# Altium PCB MainPCB.PcbDoc
Units mm, origin at the board's own origin, x right, y up, seen from the top; angles counter-clockwise.
Board outline 88.9 x 50.8 mm, 2 copper layers (Top Layer, Bottom Layer); 35 components, 31 nets, 192 pads, 0 vias.
Unrouted connection lines stored in the file: 103.
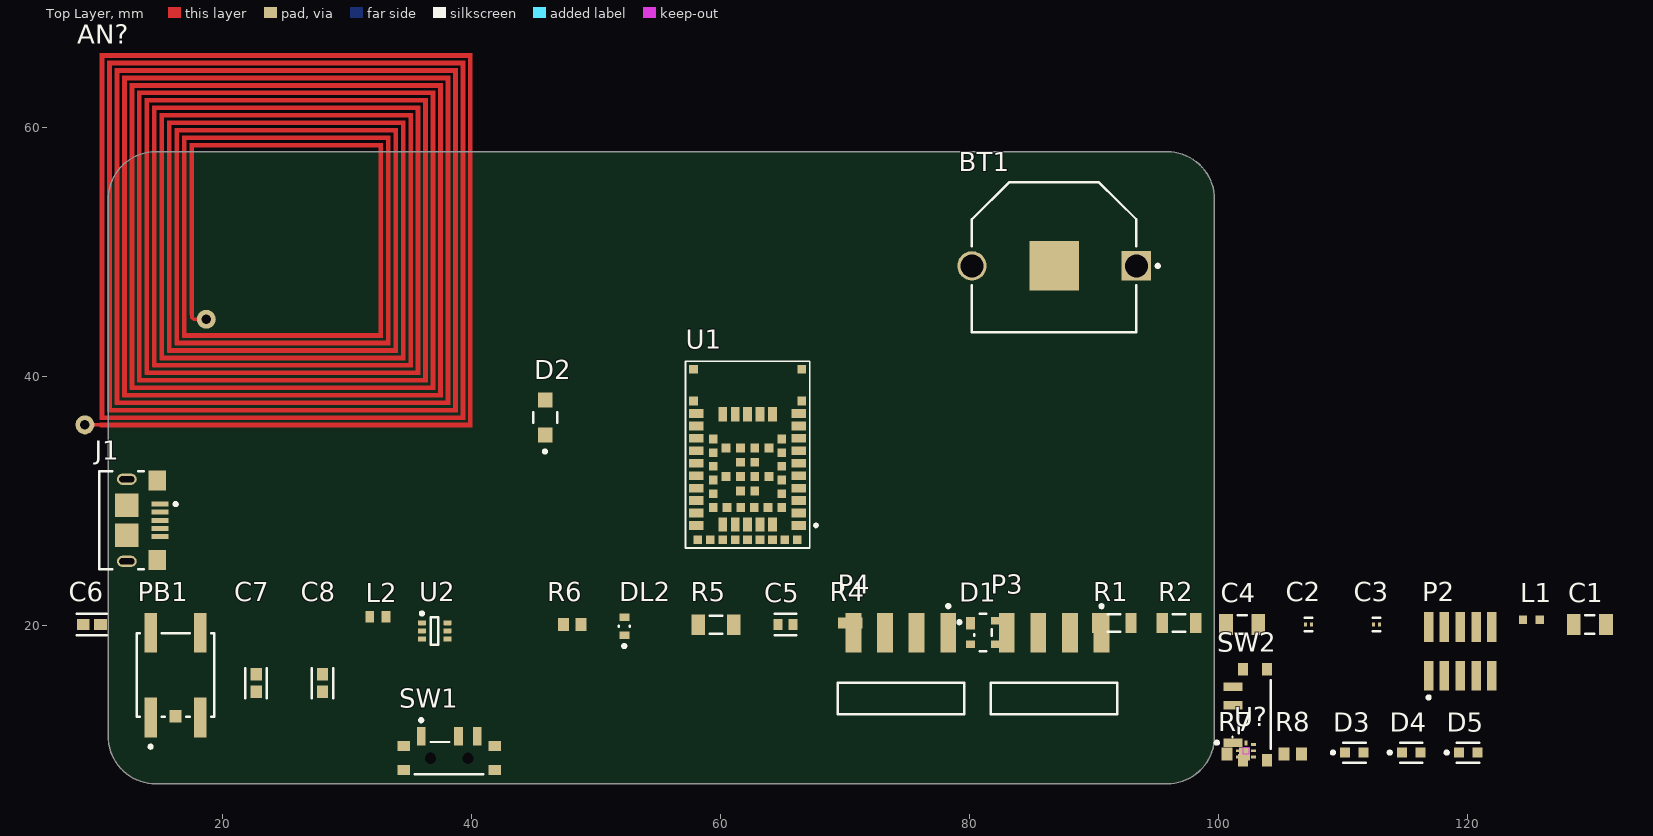
[diagram p0: Top Layer view]
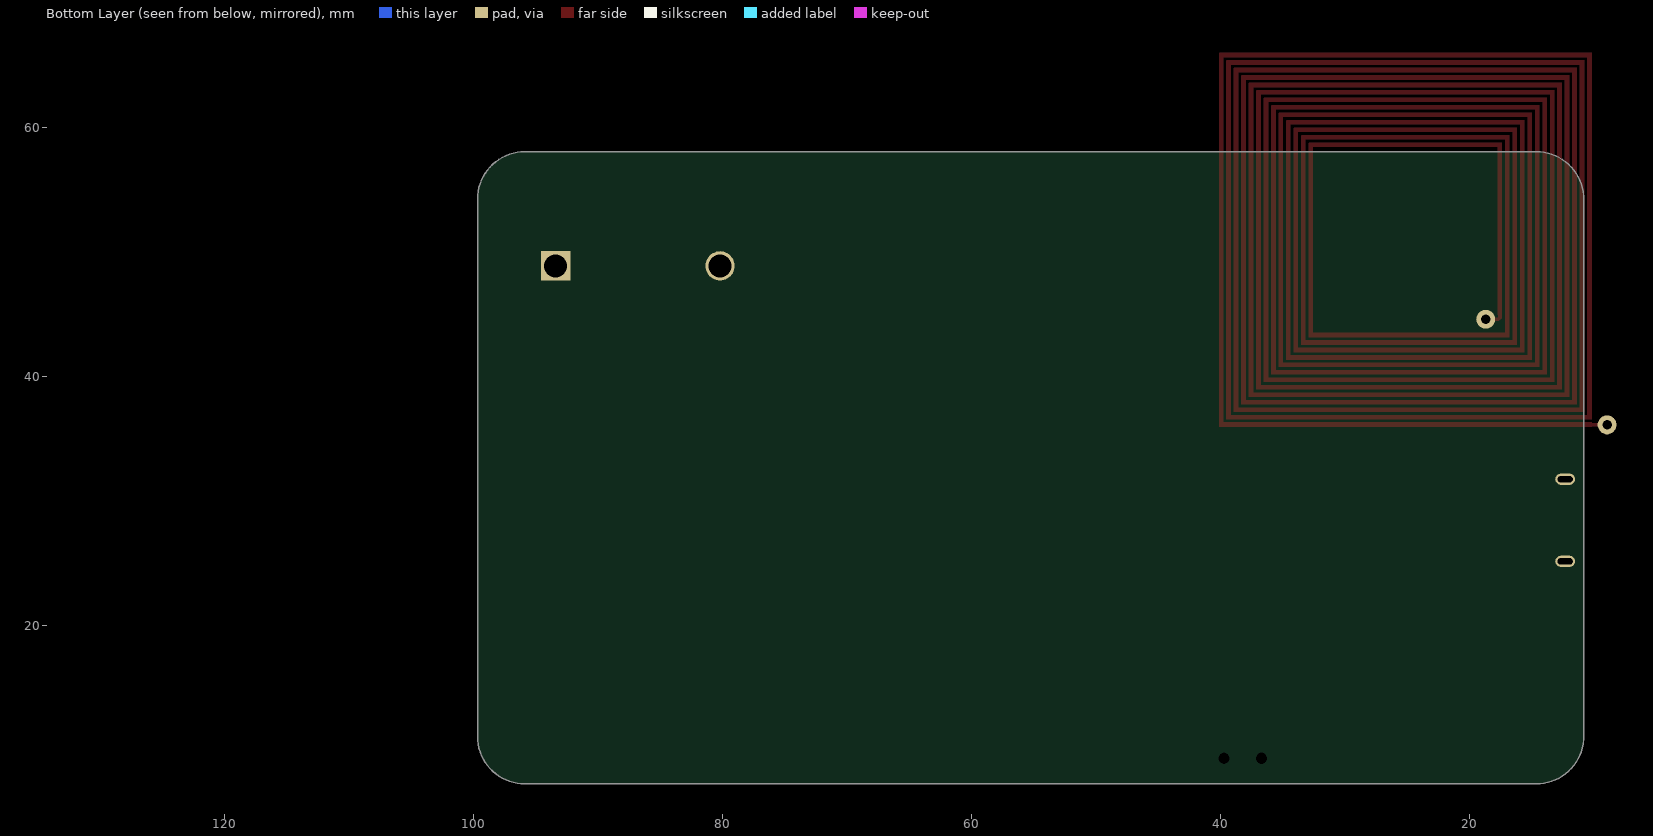
[diagram p1: Bottom Layer view, seen from below]

## Layer stack, top to bottom
Top Solder: solder mask 0.0102, Solder Resist, Dk 3.5
Top Layer: signal copper 0.0356
Dielectric 1: dielectric 0.32, FR-4, Dk 4.8
Bottom Layer: signal copper 0.0356
Bottom Solder: solder mask 0.0102, Solder Resist, Dk 3.5

## Board outline
10.795,11.049 10.795,54.229 cw(c14.605,54.229) 14.605,58.039 95.885,58.039 cw(c95.885,54.229) 99.695,54.229 99.695,11.049 cw(c95.885,11.049) 95.885,7.239 14.605,7.239 cw(c14.605,11.049)

## Design rules (kind name [scope] priority, off if disabled: settings)
Clearance [All] p1: gap=0.254 ignorepadtopadclearanceinfootprint=FALSE except(0: Arc-Hole Track-Hole SMDPad-Hole THPad-Hole Via-Hole Fill-Hole Poly-Hole Region-Hole Text-Hole)
PolygonConnect [All] p1: connectstyle=Relief reliefconductorwidth=0.254 reliefentries=4 polygonreliefangle="90 Angle" airgapwidth=0.254
RoomDefinition MainSchematic [InComponentClass('MainSchematic')] p1: confinementstyle=ConfineIn formatcopy=TRUE lockcomponents=FALSE outline 6.096,3.81 101.538,3.81 101.538,60.046 6.096,60.046
RoutingVias [All] p1: holewidth=0.711 width=1.27 viastyle="Through Hole" minholewidth=0.711 minwidth=1.27 maxholewidth=0.711 maxwidth=1.27
SolderMaskExpansion [All] p1: expansion=0.102 istentingtop=FALSE
Width [All] p1: maxlimit=0.254 minlimit=0.254 preferedwidth=0.254
30 further rules are at their usual default settings.

## Components (designator, comment, footprint, x,y, rotation, side; value= is the part's Value field where it differs from the comment)
AN? "NFC Antenna" NFC_Antenna 10.16,35.941 r0 top
BT1 "3001" KSTN-3001_V 86.806,48.87 r180 top
C1 "12065C102KAT2A" AVX-12065C102KAT2A_L 129.859,20.041 r0 top
C2 "GRM033R60J104KE19D" FP-GRM033-0_03-MFG 107.253,20.041 r0 top
C3 "GRM033R60J104KE19D" FP-GRM033-0_03-MFG 112.714,20.041 r0 top
C4 "12065C102KAT2A" AVX-12065C102KAT2A_L 101.919,20.041 r0 top
C5 "C0603C472J5RAC" FP-C0603C-CF-MFG 65.216,20.041 r0 top value="4,700 pF"
C6 "GRM188R60G106ME47D" FP-GRM188-0_1-e0_2_0_55-IPC_B 9.463,20.041 r0 top
C7 "GRM188R60G106ME47D" FP-GRM188-0_1-e0_2_0_55-IPC_B 22.671,15.342 r90 top
C8 "GRM188R60G106ME47D" FP-GRM188-0_1-e0_2_0_55-IPC_B 28.005,15.342 r90 top
D1 "PRTR5V0U2X,215" FP-SOT143B-MFG 81.091,19.406 r0 top
D2 "PMEG6020ELRX" FP-SOD123W-MFG 45.912,36.678 r90 top
D3 "VLMS1300-GS08" FP-6_541-5092_01-4-MFG 110.936,9.754 r0 top
D4 "VLMY1300-GS08" FP-6_541-5092_01-4-MFG 115.508,9.754 r0 top
D5 "VLMO1300-GS08CT" FP-6_541-5092_01-4-MFG 120.08,9.754 r0 top
DL2 "TLMP1100-GS08" FP-6_541-5056_01-4-MFG 52.262,19.914 r90 top
J1 "10118193-0001LF" FCI-10118193-0001LF-5_V 13.632,28.423 r270 top
L1 "BLM18EG101TN1D" MURA-BLM18-RF-H3-CHIP-2_V 125.16,20.422 r0 top
L2 "GLFR1608T4R7M-LR" INDC1608X100X35LL20T15 32.45,20.676 r0 top
P2 "20021121-00010C4LF" HDR2X5_SMT 119.445,17.882 r0 top
P3 "TSM-104-01-T-SH" SMTC-TSM-104-01-X-SH 86.806,13.975 r180 top
P4 "TSM-104-01-T-SH" SMTC-TSM-104-01-X-SH 74.487,13.975 r180 top
PB1 "EVQ-Q2H03W" FP-EVQ-Q2H03W-MFG 16.194,15.977 r90 top
R1 "CRCW12064K70JNEA" RESC3216X60X45LL10T20 91.632,20.168 r0 top
R2 "CRCW12064K70JNEA" RESC3216X60X45LL10T20 96.839,20.168 r0 top
R4 "ERJ-3EKF1004V" RESC1608X55X30LL15T15 70.423,20.168 r0 top
R5 "ERJ8ENF3300V" RESC3216X70X50NL05T20 59.628,20.041 r0 top
R6 "CRCW0603100RFKEA" RESC1609X50X30ML8T20 48.071,20.041 r0 top
R7 "CRCW0603100RFKEA" RESC1609X50X30ML8T20 101.411,9.627 r0 top
R8 "CRCW0603100RFKEA" RESC1609X50X30ML8T20 105.983,9.627 r0 top
SW1 "PCM12SMTR" CKCP-PCM12SMTR_V 38.189,9.302 r0 top
SW2 "PCM12SMTR" CKCP-PCM12SMTR_V 102.935,12.802 r90 top
U1 "NINA-B306" NINA_LGA71R_1500X1000X223_PCB 62.168,33.707 r90 top
U2 "TPS61221DCKR" DCK0006A_L 37.022,19.533 r0 top
U? "NT3H1101W0FHKH" NXP-SOT902-3_V 102.235,9.906 r0 top

## Footprints (in the part's own frame and the unit in brackets; to place one, negate y for a bottom-side part, rotate by r counter-clockwise, add the part's x,y. Pads: shape width x height; smd on the part's side, far side on the other; paste and mask are expansions set on the pad)
AVX-12065C102KAT2A_L [mm] "Chip Capacitor, 2-Leads, Body 3.4x1.8mm, IPC High Density"
  rect 1.1x1.7 smd: 1(-1.3,0) 2(1.3,0)
  silkscreen extent -0.35,-0.75 0.35,0.75
CKCP-PCM12SMTR_V [mm] "SMD, 3-Leads, Body 6.7x2.6mm"
  rect 0.7x1.5 smd: 1(-2.25,1.75) 2(0.75,1.75) 3(2.25,1.75)
  round 0.6 hole 0.9 unplated: MH1(-1.5,0) MH2(1.5,0)
  rect 1x0.8 smd: MP1(-3.65,0.965) MP2(3.65,0.965) MP3(-3.65,-0.965) MP4(3.65,-0.965)
  silkscreen extent -2.75,-1.3 2.75,3.17, body extent -3.68,-2.34 3.67,2.23, height 1.4
DCK0006A_L [mm] "SOT23, 6-Leads, Body 2.15x1.4mm, Pitch 0.65mm, IPC High Density"
  rrect25% 0.65x0.4 smd: 1(-1.025,0.65) 2(-1.025,0) 3(-1.025,-0.65) 4(1.025,-0.65) 5(1.025,0) 6(1.025,0.65)
  silkscreen extent -1.15,-1.1 0.3,1.52, body extent -1.14,-1 1.14,1, height 0.94
FCI-10118193-0001LF-5_V [mm] "Micro, USB-B, 5-Leads, Body 7.86x5.05mm, Pitch 0.65 mm"
  rect 0.4x1.35 smd: 1(-1.3,1.325) 2(-0.65,1.325) 3(0,1.325) 4(0.65,1.325) 5(1.3,1.325)
  rect 1.6x1.4 smd: 6(-3.2,1.1) 7(3.2,1.1)
  rect 1.9x1.9 smd: 8(-1.2,-1.35) 9(1.2,-1.35)
  oval 0.9x1.6 hole 0.5 slot 1.2 at 90 deg: 10(-3.3,-1.35) 11(3.3,-1.35)
  silkscreen extent -3.93,-3.55 3.93,2.7, body extent -3.93,-4.16 3.93,1.5, height 2.83
FP-6_541-5056_01-4-MFG [mm]
  rect 0.6x0.8 smd paste+0 mask+0: 1(-0.725,0) 2(0.725,0)
  silkscreen extent -1.72,-0.45 0.05,0.45, body extent -1.12,-0.55 1.12,0.55, height 0.25
FP-6_541-5092_01-4-MFG [mm]
  rect 0.8x0.8 smd paste+0 mask+0: 1(-0.75,0) 2(0.75,0)
  silkscreen extent -1.85,-0.8 0.9,0.8, body extent -1.25,-0.6 1.25,0.6, height 0.25
FP-C0603C-CF-MFG [mm]
  rect 0.75x0.9 smd paste+0 mask+0: 1(-0.6,0) 2(0.6,0)
  silkscreen extent -0.87,-0.85 0.88,0.85, body extent -1.2,-0.6 1.2,0.6, height 0.25
FP-EVQ-Q2H03W-MFG [mm]
  rect 1x1 smd paste+0 mask+0: 1(-3.3,0)
  rect 3.2x1 smd paste+0 mask+0: A(-3.4,2) A'(3.4,2) B(-3.4,-2) B'(3.4,-2)
  silkscreen extent -5.87,-3.1 3.35,3.1, body extent -5.1,-3.2 5.1,3.2, height 0.25
FP-GRM033-0_03-MFG [mm]
  rect 0.25x0.3 smd paste+0 mask+0: 1(-0.238,0) 2(0.238,0)
  silkscreen extent -0.32,-0.54 0.32,0.54, body extent -0.46,-0.27 0.46,0.27, height 0.25
FP-GRM188-0_1-e0_2_0_55-IPC_B [mm]
  rect 1.008x0.912 smd paste+0 mask+0: 1(-0.702,0) 2(0.702,0)
  silkscreen extent -1.21,-0.86 1.21,0.86, body extent -1.46,-0.71 1.46,0.71, height 0.25
FP-SOD123W-MFG [mm]
  rect 1.2x1.2 smd paste-1000 mask+0: 1(-1.4,0) 2(1.4,0)
  silkscreen extent -2.85,-0.95 0.43,0.95, body extent -2.2,-1.05 2.2,1.05, height 0.25
FP-SOT143B-MFG [mm]
  rect 0.7x1 smd paste-1000 mask+0: 1(-1,0.75)
  rect 0.7x0.6 smd paste-1000 mask+0: 2(-1,-0.95) 3(1,-0.95) 4(1,0.95)
  silkscreen extent -2.02,-1.5 0.7,1.5, body extent -1.5,-1.63 1.5,1.63, height 0.25
HDR2X5_SMT [mm] "Header, 10-Leads, Body 3.43x6.35mm, Pitch 1.27mm"
  rect 0.76x2.4 smd: 1(-2.54,-1.95) 2(-2.54,1.95) 3(-1.27,-1.95) 4(-1.27,1.95) 5(0,-1.95) 6(0,1.95) 7(1.27,-1.95) 8(1.27,1.95) 9(2.54,-1.95) 10(2.54,1.95)
  round 0 hole 1 unplated: MH1(-1.905,0) MH2(1.905,0)
  silkscreen extent -2.66,-3.82 -2.41,-3.58, body extent -3.17,-1.72 3.17,1.72, height 4.55
INDC1608X100X35LL20T15 [mm] "Chip Inductor, 2-Leads, Body 1.8x1mm, IPC High Density"
  rect 0.71x0.92 smd: 1(-0.65,0) 2(0.65,0)
  body extent -0.9,-0.5 0.9,0.5, height 1
KSTN-3001_V [mm] "THD, 2-Leads, Body 13.21x12.07mm"
  rect 2.35x2.35 hole 1.85: 1(-6.605,0)
  round 2.35 hole 1.85: 2(6.605,0)
  rect 3.96x3.96 smd: 3(0,0)
  silkscreen extent -8.45,-6.73 6.61,5.34, body extent -6.61,-6.73 6.61,5.34, height 3
MURA-BLM18-RF-H3-CHIP-2_V [mm] "Chip Ferrite Bead, 2-Leads, Body 1.6x0.8mm, Height 0.65mm, Reflow"
  rect 0.65x0.7 smd: 1(-0.675,0) 2(0.675,0)
  body extent -0.8,-0.4 0.8,0.4, height 0.65
NFC_Antenna [mil] "L=5.51 uH, tuned for 13.56 MHz"
  round 60 hole 30: AC0(335,340) AC1(-49.09,5.91)
  Top Layer region: 0,0 0,11.81 1165.35,11.81 1165.35,1169.29 11.81,1169.29 11.81,35.43 1141.73,35.43 1141.73,1145.67 35.43,1145.67 35.43,59.06 1118.11,59.06 1118.11,1122.05 59.06,1122.05 59.06,82.68 1094.49,82.68 1094.49,1098.43 82.68,1098.43 82.68,106.3 1070.87,106.3 1070.87,1074.8 106.3,1074.8 106.3,129.92 1047.24,129.92 1047.24,1051.18 129.92,1051.18 129.92,153.54 1023.62,153.54 1023.62,1027.56 153.54,1027.56 153.54,177.17 1000,177.17 1000,1003.94 177.17,1003.94 177.17,200.79 976.38,200.79 976.38,980.32 200.79,980.32 200.79,224.41 952.76,224.41 952.76,956.69 224.41,956.69 224.41,248.03 929.13,248.03 929.13,933.07 248.03,933.07 248.03,271.65 905.51,271.65 905.51,909.45 271.65,909.45 271.65,295.28 881.89,295.28 881.89,885.83 295.28,885.83 295.28,354.33 283.46,354.33 283.46,897.64 893.7,897.64 893.7,283.46 259.84,283.46 259.84,921.26 917.32,921.26 917.32,259.84 236.22,259.84 236.22,944.88 940.94,944.88 940.94,236.22 212.6,236.22 212.6,968.5 964.57,968.5 964.57,212.6 188.98,212.6 188.98,992.13 988.19,992.13 988.19,188.98 165.35,188.98 165.35,1015.75 1011.81,1015.75 1011.81,165.35 141.73,165.35 141.73,1039.37 1035.43,1039.37 1035.43,141.73 118.11,141.73 118.11,1062.99 1059.06,1062.99 1059.06,118.11 94.49,118.11 94.49,1086.61 1082.68,1086.61 1082.68,94.49 70.87,94.49 70.87,1110.24 1106.3,1110.24 1106.3,70.87 47.24,70.87 47.24,1133.86 1129.92,1133.86 1129.92,47.24 23.62,47.24 23.62,1157.48 1153.54,1157.48 1153.54,23.62 0,23.62 0,1181.1 1177.17,1181.1 1177.17,0
  Top Layer lines w0.5: 0,0 0,11.81 1165.35,11.81 1165.35,1169.29 11.81,1169.29 11.81,35.43 1141.73,35.43 1141.73,1145.67 35.43,1145.67 35.43,59.06 1118.11,59.06 1118.11,1122.05 59.06,1122.05 59.06,82.68 1094.49,82.68 1094.49,1098.43 82.68,1098.43 82.68,106.3 1070.87,106.3 1070.87,1074.8 106.3,1074.8 106.3,129.92 1047.24,129.92 1047.24,1051.18 129.92,1051.18 129.92,153.54 1023.62,153.54 1023.62,1027.56 153.54,1027.56 153.54,177.17 1000,177.17 1000,1003.94 177.17,1003.94 177.17,200.79 976.38,200.79 976.38,980.32 200.79,980.32 200.79,224.41 952.76,224.41 952.76,956.69 224.41,956.69 224.41,248.03 929.13,248.03 929.13,933.07 248.03,933.07 248.03,271.65 905.51,271.65 905.51,909.45 271.65,909.45 271.65,295.28 881.89,295.28 881.89,885.83 295.28,885.83 295.28,354.33 283.46,354.33 283.46,897.64 893.7,897.64 893.7,283.46 259.84,283.46 259.84,921.26 917.32,921.26 917.32,259.84 236.22,259.84 236.22,944.88 940.94,944.88 940.94,236.22 212.6,236.22 212.6,968.5 964.57,968.5 964.57,212.6 188.98,212.6 188.98,992.13 988.19,992.13 988.19,188.98 165.35,188.98 165.35,1015.75 1011.81,1015.75 1011.81,165.35 141.73,165.35 141.73,1039.37 1035.43,1039.37 1035.43,141.73 118.11,141.73 118.11,1062.99 1059.06,1062.99 1059.06,118.11 94.49,118.11 94.49,1086.61 1082.68,1086.61 1082.68,94.49 70.87,94.49 70.87,1110.24 1106.3,1110.24 1106.3,70.87 47.24,70.87 47.24,1133.86 1129.92,1133.86 1129.92,47.24 23.62,47.24 23.62,1157.48 1153.54,1157.48 1153.54,23.62 0,23.62 0,1181.1 1177.17,1181.1 1177.17,0 0,0
  Top Layer lines w11.81: -49.09,5.91 0,5.91 ; 289.37,354.33 289.37,345.63 295,340 335,340
NINA_LGA71R_1500X1000X223_PCB [mm] "Stand-alone Bluetooth low energy module"
  rect 0.7x1.15 smd paste+0 mask+0.05: 1(-5.7,-4.125) 2(-4.7,-4.125) 3(-3.7,-4.125) 4(-2.7,-4.125) 5(-1.7,-4.125) 6(-0.7,-4.125) 7(0.3,-4.125) 8(1.3,-4.125) 9(2.3,-4.125) 10(3.3,-4.125) 16(3.3,4.125) 17(2.3,4.125) 18(1.3,4.125) 19(0.3,4.125) 20(-0.7,4.125) 21(-1.7,4.125) 22(-2.7,4.125) 23(-3.7,4.125) 24(-4.7,4.125) 25(-5.7,4.125)
  rect 1.15x0.7 smd paste+0 mask+0.05: 11(3.225,-2) 12(3.225,-1) 13(3.225,0) 14(3.225,1) 15(3.225,2) 26(-5.625,2) 27(-5.625,1) 28(-5.625,0) 29(-5.625,-1) 30(-5.625,-2)
  rect 0.7x0.7 smd paste+0 mask+0.05: 31(-4.25,-2.75) 32(-3.15,-2.75) 33(-2.05,-2.75) 34(-0.95,-2.75) 35(0.15,-2.75) 36(1.25,-2.75) 37(1.25,2.75) 38(0.15,2.75) 39(-0.95,2.75) 40(-2.05,2.75) 41(-3.15,2.75) 42(-4.25,2.75) 43(-4.25,1.65) 44(-4.25,0.55) 45(-4.25,-0.55) 46(-4.25,-1.65) 47(-6.85,4) 48(-6.85,3) 49(-6.85,2) 50(-6.85,1) 51(-6.85,0) 52(-6.85,-1) 53(-6.85,-2) 54(-6.85,-3) 55(-6.85,-4) 56(-2.925,-0.575) 57(-2.925,0.575) 58(-1.775,-1.725) 59(-1.775,-0.575) 60(-1.775,0.575) 61(-1.775,1.725) 62(-0.625,-0.575) 63(-0.625,0.575) 64(0.525,-1.725) 65(0.525,-0.575) 66(0.525,0.575) 67(0.525,1.725) 68(4.3,-4.35) 69(6.85,-4.35) 70(6.85,4.35) 71(4.3,4.35)
  Multi-Layer pour cut-out: 4.4,4 7.5,4 7.5,-4 4.4,-4
  silkscreen extent -7.5,-5.6 7.5,5, body extent -7.5,-5 7.5,5, height 2.31
NXP-SOT902-3_V [mm] "QFN, 8-Leads, Body 1.6x1.6mm, Pitch 0.5mm"
  rect 0.4x0.32 smd: 1(-0.6,0.5)
  rect 0.4x0.22 smd: 2(-0.6,0) 3(-0.6,-0.5) 5(0.6,-0.5) 6(0.6,0) 7(0.6,0.5)
  rect 0.22x0.4 smd: 4(0,-0.6) 8(0,0.6)
  Top Layer keep-out region: -0.25,-0.25 0.25,-0.25 0.25,0.25 -0.25,0.25
  silkscreen extent -1.15,1.05 -1.05,1.15, body extent -0.8,-0.8 0.8,0.8, height 0.5
RESC1608X55X30LL15T15 [mm] "Chip Resistor, 2-Leads, Body 1.60x0.80mm, IPC High Density"
  rect 0.7x0.85 smd: 1(-0.625,0) 2(0.625,0)
  body extent -0.87,-0.48 0.87,0.48, height 0.55
RESC1609X50X30ML8T20 [mm] "Chip Resistor, 2-Leads, Body 1.65x0.95mm, IPC Low Density"
  rect 0.9x1.05 smd: 1(-0.7,0) 2(0.7,0)
  body extent -0.82,-0.48 0.82,0.48, height 0.5
RESC3216X60X45LL10T20 [mm] "Chip Resistor, 2-Leads, Body 3.20x1.60mm, IPC High Density"
  rect 0.9x1.6 smd: 1(-1.35,0) 2(1.35,0)
  silkscreen extent -0.5,-0.7 0.5,0.7, body extent -1.65,-0.85 1.65,0.85, height 0.6
RESC3216X70X50NL05T20 [mm] "Chip Resistor, 2-Leads, Body 3.20x1.60mm, IPC Medium Density"
  rect 1.1x1.65 smd: 1(-1.425,0) 2(1.425,0)
  silkscreen extent -0.5,-0.72 0.5,0.72, body extent -1.63,-0.82 1.62,0.82, height 0.7
SMTC-TSM-104-01-X-SH [mm] "Terminal Strip Single Surface Mount, 1x4 Pins, Horizontal, 2.54mm Pitch, Male"
  rect 1.27x3.18 smd: 1(-3.81,-5.402) 2(-1.27,-5.402) 3(1.27,-5.402) 4(3.81,-5.402)
  silkscreen extent -5.08,-7.67 5.08,1.15, body extent -5.08,-5.96 5.08,6.99, height 3.05

## Part data
AN?: library part NFC_Antenna, "L=5.51 uH, tuned for 13.56 MHz", L="5.51 uH"
BT1: library part CMP-2000-05463-1, "Holder Battery Coin, 12 mm, 2-Pin THD, RoHS", Manufacturer=Keystone, Package Description="2-Pin Through Hole Device, Body 13.21 x 12.07 mm", Datasheet URL=https://datasheet.ciiva.com/3/3001-3954.pdf, Datasheet Version="Rev. H, 09/2006", Manufacturer URL=http://www.keyelco.com/, Mounting Technology=ThroughHole, Package Reference=3001
C1 C4: library part CMP-2000-05865-1, "Chip Capacitor, 1 nF, +/- 10%, 50 V, -55 to 125 degC, 1206 (3216 Metric), RoHS, Tape and Reel", Capacitance=1nF, Case Size/Dimension=1206, Dielectric=X7R, Manufacturer=AVX, Package Description="2-Pin Surface Mount Device, Body 3.2 x 1.6 mm", Rated Voltage=50V, Tolerance (%)=±10%, Datasheet URL=http://datasheets.avx.com/X7RDielectric.pdf, Datasheet Version=07/2016, Manufacturer URL=http://www.avx.com/, Mounting Technology=SurfaceMount, Package=1206, Package Reference=1206
C2 C3: library part CMP-06035-000062-2, "Chip Multilayer Ceramic Capacitors for General Purpose, 0201, 0.10uF, X5R, 15%, 10%, 6.3V", Capacitance=100nF, Case Code (Imperial)=0201, Case Code (Metric)=0603, Dielectric=X5R, Max Operating Temperature=85°C, Min Operating Temperature=-55°C, Package Quantity=1, Tolerance=10%, Voltage=6.3V, Case/Package=0201, Depth=0.3mm, Height=0.3mm, Lead Free="Lead Free", Length=0.6mm, Material=Ceramic, Mount="Surface Mount", Packaging="Tape and Reel", Radiation Hardening=No, REACH SVHC="No SVHC", Termination=SMD/SMT, Thickness=0.013inch, Voltage Rating=6.3V, Voltage Rating (DC)=6.3V, Weight=6E-06oz, Width=0.012inch
C5: library part CMP-03020-004543-2, "C0603 4,700 pF X7R 30ppm/°C 5.00% 50 V", Capacitance="4,700 pF", Manufacturer=KEMET, Package=C0603C-CF, Temperature="-55°C to +125°C", Temperature Characteristic=X7R, Temperature Coefficient=30ppm/°C, Temperature Range High=+125°C, Temperature Range Low=-55°C, Tolerance=0.05, Voltage Rating="50 V", Automotive=Yes, Automotive Grade="Grade 1", Category=Cap, ComponentLink2Description=Datasheet, ComponentLink2URL=https://api.kemet.com/component-edge/download/datasheet/C0603C100J5GACAUTO.pdf, Device Class L1="Passive Components", Device Class L2=Capacitors, Device Class L3="Ceramic Capacitors", Height=0.87mm, Lead Free=Yes, Manufacturer Part Number=C0603C472J5RAC, Material=Ceramic, Mouser Description="Cap Ceramic 0.0047uF 50V X7R 5% Pad SMD 0603 125C Bag", Octopart=https://octopart.com/c0603c472j5rac-kemet-965121, RoHS=TRUE
C6 C7 C8: library part CMP-2006-02787-5, "Chip Multilayer Ceramic Capacitors for General Purpose, 0603, 10uF, X5R, 15%, 20%, 4V", Capacitance=10uF, Case Code (Imperial)=0603, Case Code (Metric)=1608, Dielectric=X5R, Max Operating Temperature=85°C, Min Operating Temperature=-55°C, Package Quantity=4000, Tolerance=20%, Voltage=4V, Case/Package=0603, Depth=0.8mm, Height=0.8mm, Lead Free="Lead Free", Length=1.6mm, Mount="Surface Mount", Packaging="Tape and Reel", Radiation Hardening=No, Termination=SMD/SMT, Thickness=0.035inch, Voltage Rating=4V, Voltage Rating (DC)=4V, Width=0.8mm
D1: library part CMP-14436-000007-1, "TVS DIODE 5.5V SOT143B", Manufacturer=Nexperia, Package=SOT-143B
D2: library part CMP-14398-000020-1, "DIODE SCHOTTKY 60V 2A SOD123W"
D3: library part CMP-02520-000012-1, "LED RED 0603 SMD", Ambient Temperature Range High=+85°C, Ambient Temperature Range Low=-35°C, Colour=Red, Forward Current=20mA, Forward Voltage=2V, Manufacturer=Vishay, Package=6.541-5092.01-4, Power Dissipation=75mW, Reverse Voltage=5V, Temperature="-35°C to +85°C", Automotive=No, Category=Diode, ComponentLink2Description=Datasheet, ComponentLink2URL=http://www.vishay.com/docs/82437/vlmo1300.pdf, Device Class L1=Optoelectronics, Device Class L2=LEDs, Device Class L3=unset, Digikey Description="LED RED 0603 SMD", Height=1mm, Lead Free=Yes, Led Orientation="Top View", Luminous Intensity=54mcd, Manufacturer Part Number=VLMS1300-GS08, Mouser Description="Standard LEDs - SMD Super Red Clear Non-Diff", Octopart=https://octopart.com/vlms1300-gs08-vishay-21709201, Peak Emmision Wavelength=639nm, RoHS=TRUE, Temperature Range High=+85°C, Temperature Range Low=-35°C, Viewing Angle=130°, Wavelength=631nm
D4: library part CMP-02520-000001-1, "LED YELLOW 0603 SMD", Ambient Temperature Range High=+85°C, Ambient Temperature Range Low=-35°C, Colour=Yellow, Forward Current=20mA, Forward Voltage=2.4V, Manufacturer=Vishay, Package=6.541-5092.01-4, Power Dissipation=75mW, Reverse Voltage=5V, Temperature="-35°C to +85°C", Automotive=No, Category=Diode, ComponentLink2Description=Datasheet, ComponentLink2URL=https://www.vishay.com/docs/82437/vlmo1300.pdf, Device Class L1=Optoelectronics, Device Class L2=LEDs, Device Class L3=unset, Digikey Description="LED YELLOW 0603 SMD", Height=1mm, Lead Free=Yes, Led Orientation="Top View", Luminous Intensity=28-180mcd, Manufacturer Part Number=VLMY1300-GS08, Octopart=https://octopart.com/vlmy1300-gs08-vishay-21709204, Peak Emmision Wavelength=588nm, RoHS=TRUE, Temperature Range High=+85°C, Temperature Range Low=-35°C, Viewing Angle=130°, Wavelength=597nm
D5: library part CMP-02520-000001-1, "LED YELLOW 0603 SMD", Ambient Temperature Range High=+85°C, Ambient Temperature Range Low=-35°C, Colour=Yellow, Forward Current=20mA, Forward Voltage=2.4V, Manufacturer=Vishay, Manufacturer Part Number=VLMY1300-GS08, Package=6.541-5092.01-4, Power Dissipation=75mW, Reverse Voltage=5V, Temperature="-35°C to +85°C", Automotive=No, Category=Diode, ComponentLink2Description=Datasheet, ComponentLink2URL=https://www.vishay.com/docs/82437/vlmo1300.pdf, Device Class L1=Optoelectronics, Device Class L2=LEDs, Device Class L3=unset, Digikey Description="LED YELLOW 0603 SMD", Height=1mm, Lead Free=Yes, Led Orientation="Top View", Luminous Intensity=28-180mcd, Octopart=https://octopart.com/vlmy1300-gs08-vishay-21709204, Peak Emmision Wavelength=588nm, RoHS=TRUE, Supplier 1=Digi-Key, Temperature Range High=+85°C, Temperature Range Low=-35°C, Viewing Angle=130°, Wavelength=597nm
DL2: library part CMP-02520-000009-1, "LED GREEN 0603 SMD", Ambient Temperature Range High=+100°C, Ambient Temperature Range Low=-40°C, Colour="Pure green", Forward Current=20mA, Forward Voltage=2.1V, Manufacturer=Vishay, Max Junction Temp=+120°C, Package=0603, Power Dissipation=90mW, Reverse Voltage=6V, Temperature="to +120°C", Automotive=Yes, Automotive Grade="Grade 3", Category=Diode, ComponentLink2Description=Datasheet, ComponentLink2URL=http://www.vishay.com/docs/83173/tlmb1100.pdf, Device Class L1=Optoelectronics, Device Class L2=LEDs, Device Class L3=unset, Digikey Description="LED GREEN 0603 SMD", Height=0.65mm, Lead Free=Yes, Led Orientation="Top View", Luminous Intensity=15mcd, Manufacturer Part Number=TLMP1100-GS08, Mouser Description="Standard LEDs - SMD Pure Green", Octopart=https://octopart.com/tlmp1100-gs08-vishay-55433993, Peak Emmision Wavelength=562nm, RoHS=TRUE, Temperature Range High=+120°C, Viewing Angle=160°, Wavelength=561nm
J1: library part CMP-2000-05119-1, "Micro USB B Type Receptacle, -55 to 85 degC, 5-Pin SMD, RoHS, Tape and Reel", Color=Black, Current Rating=1.8A, Flammability Rating=UL94V-0, Insulation Resistance=1000MOhms, Manufacturer=FCI, Operating Temperature Range=-55Cto+85C, Brand=FCI, Connector Type=MicroUSBTypeBreceptacle, Contact Material=CopperAlloy, Contact Plating=Gold, Datasheet URL=http://datasheet.octopart.com/10118193-0001LF-FCI-datasheet-55953155.pdf, Datasheet Version="Rev. C, 05/2015", Factory Pack Quantity=1200, Gender=Female, Manufacturer URL=http://www.fci.com/, Mounting Angle=Right, Number Of Contacts=5Contact, Packaging=Reel, Product=MicroUSBTypeBConnectors, Product Category=USBConnectors, RoHS=Details, Standard=USB2.0, Termination Style=SMD/SMT
L1: library part CMP-0686-00530-2, "Chip Ferrite Bead for GHz Band General Use (Low DC Resistance Type), 100 Ohm, 2000 mA, -55 to 125 degC, 1.6 x 0.8 x 0.65 mm SMD, Tape and Reel", DC Resistance="0.045 Ohm Max.", Manufacturer=Murata, Operating Temperature Range="-55 to 125 degC", Package=0603, Rated Current="2000 mA", ComponentLink1Description="Manufacturer URL", ComponentLink1URL=http://www.murata.com/, ComponentLink2Description=Datasheet, ComponentLink2URL=http://www.murata.com/products/catalog/pdf/c31e.pdf, ComponentLink3Description="Package Specification", ComponentLink3URL=http://www.murata.com/products/catalog/pdf/c31e.pdf, DatasheetVersion=08/2013, Impedance (at 100 MHz)="100 Ohm +/- 25%", Mounting Technology="Surface Mount", PackageDescription="2-Pin Chip, Body 1.6 x 0.8 mm", PackageReference=BLM18_H650-2, Packing="Tape and Reel", PartNumber=BLM18EG101TN1D
L2: library part CMP-2000-06322-1, "Chip Inductor, 4.7 uH, +/- 20%, -40 to 105 degC, 0603 (1608 Metric), RoHS, Tape and Reel", Current - Saturation=170mA, Current Rating=110mA, DC Resistance (DCR)=240mOhm, Inductance=4.7µH, Manufacturer=TDK, Operating Temperature=-40°C~105°C, Package / Case=0603(1608Metric), Package Description="2-Pin Surface Mount Device, Body 1.6 x 0.8 mm", Package Reference=0603, Standard Package=4,000, Tolerance=±20%, Catalog Drawings="1608(0603)Top /  / 1608(0603)Side", Category=Inductors,Coils,Chokes, Datasheet URL=http://media.digikey.com/pdf/Data%20Sheets/TDK%20PDFs/GLFR%20Series.pdf, Datasheet Version=07/2008, Dynamic Catalog=GLFRSeries, Family=FixedInductors, Manufacturer URL=http://www.tdk.com/, Mounting Technology=SurfaceMount, Mounting Type=SurfaceMount, Other Names=445-3607-2, Other Related Documents=1608(0603)Footprint, Packaging=Tape&Reel(TR), Series=GLFR, Shielding=Shielded, Size / Dimension="0.063\"Lx0.031\"Wx0.031\"H(1.60mmx0.80mmx0.80mm)"
P2: library part CMP-2000-05523-1, "Male Header, Pitch 1.27 mm, 2 x 5 Position, Height 4.55 mm, -40 to 85 degC, RoHS, Tape and Reel", Contact resistance Max=30MOhm, Current Rating=1A, Manufacturer=FCI, Package="SMT 10P", Package Description="10-Leads Header, Body 3.43 x 6.35, Pitch 1.27 mm", Package Reference=20021121, Package Version="Rev. J, 03/2013", Voltage Rating=125V, Brand=FCI, Contact Material=CopperAlloy, Contact Plating=Gold, Datasheet URL=https://datasheet.ciiva.com/11749/0900766b8118d62a-11749057.pdf, Datasheet Version=06/2011, Factory Pack Quantity=600, Gender=Male, Manufacturer URL=http://portal.fciconnect.com/, Mating Post Length=3.05mm, Mounting Angle=Vertical, Mounting Style=SMD/SMT, Mounting Technology=SurfaceMount, Number of Positions=10, Number of Positions / Contacts=10, Number of Rows=2, Package URL=https://datasheet.ciiva.com/26853/getdatasheetpartid-177140-26853984.pdf, Packaging=Reel, Pitch=1.27mm, Product Category=Headers&WireHousings, Product Type=Headers, RoHS=Details, Series=Minitek, Stack Height=3mm, Termination Style=SMD, Type=Unshrouded
P3 P4: library part CMP-1024-00223-1, "0.025\" SQ Post Header, Surface Mount, Horizontal, -55 to 105 degC, 2.54 mm Pitch, 4-Pin, Male, RoHS", Manufacturer=Samtec, Temperature Range="-55 to 105 degC", ComponentLink1Description="Manufacturer URL", ComponentLink1URL=http://www.samtec.com, ComponentLink2Description=Datasheet, ComponentLink2URL=http://www.samtec.com/documents/webfiles/pdf/TSM.PDF, ComponentLink3Description="Package Specification", ComponentLink3URL=http://www.samtec.com/documents/webfiles/cpdf/TSM-1XX-XX-XXX-SH-XX-XXX-XX-MKT1.pdf, DatasheetVersion=F-214, Mounting Technology="Surface Mount", Orientation=Horizontal, PackageDescription="Terminal Strip Single Surface Mount", PackageReference=TSM-104-01-X-SH, PackageVersion="CD, 7/1991", PartNumber=TSM-104-01-T-SH, Pitch="2.54 mm", RoHS=True
PB1: library part CMP-05618-000002-1, "SWITCH TACTILE SPST-NO 0.02A 15V", Contact Current Rating=20mA, Contact Resistance=100mΩ, Manufacturer="Panasonic Electronic Components", Operating Force=1N, Package="SMT 4P", Temperature="-40°C to +85°C", Temperature Range High=+85°C, Temperature Range Low=-40°C, Voltage Rating DC=15V, Automotive=No, Category=Switch, ComponentLink2Description=Datasheet, ComponentLink2URL=https://industrial.panasonic.com/ac/cdn/e/control/switch/light-touch/catalog/sw_lt_eng_6s_th.pdf, Device Class L1=Electromechanical, Device Class L2=Switches, Device Class L3="Tactile Switches", Digikey Description="SWITCH TACTILE SPST-NO 0.02A 15V", Electromechanical Life=1000000Cycles, Height=3.3mm, Lead Free=Yes, Manufacturer Part Number=EVQ-Q2H03W, Mount="Surface Mount", Mouser Description="Switch Tactile ON OFF SPST Round Button J-Bend 0.02A 15VDC 1N SMD Embossed T/R", Octopart=https://octopart.com/evq-q2h03w-panasonic-1368538, RoHS=TRUE, Throw Configuration=SPST-NO
R1 R2: library part CMP-2003-02236-1, "Resistor, 4.7kOhm", Manufacturer="Vishay Dale", Package=1206, Part Number=CRCW12064K70JNEA
R4: library part CMP-1012-00849-2, Manufacturer=Panasonic, Part Number=ERJ-3EKF1004V
R5: library part CMP-2003-00307-1, "Resistor, 330 Ohm", Manufacturer=Panasonic, Package=1206, Part Number=ERJ8ENF3300V
R6 R7 R8: library part CMP-2000-03824-5, "Chip Resistor, 100 Ohm, +/- 1%, 100 mW,-55 to 155 degC, 0603 (1608 Metric), RoHS, Tape and Ree", Manufacturer="Vishay Semiconductor", ComponentLink1Description="Manufacturer URL", ComponentLink1URL=http://www.vishay.com/, ComponentLink2Description=Datasheet, ComponentLink2URL=http://www.vishay.com/docs/20035/dcrcwe3.pdf, DatasheetVersion=06/2012, Mounting Technology="Surface Mount", PackageDescription="2-Pin Surface Mount Device, Body 1.575 x 0.85 mm", PackageReference=0603
SW1 SW2: library part CMP-2000-06884-1, "Ultraminiature Slide Switch, SPDT, 0.3 A, 6 V, -20 to 85 degC, 3-Pin SMD, RoHS, Tape and Reel", Contact Current-Max=0.3A, Manufacturer="C&K Components", Package Description="3-Pin Surface Mount Device, Body 6.7 x 2.6 mm", Circuitry=SPDT, Contact Material=SilverOverCopper, Datasheet URL=http://www.ck-components.com/media/1424/pcm.pdf, Datasheet Version=02/2016, Manufacturer URL=http://www.ckswitches.com/, Mounting Technology=SurfaceMount, Package Reference=PCM12SMTR, Switch Operation=On-On, Termination Style=RightAngle/SurfaceMount
U1: "Stand-alone Bluetooth low energy module", Manufacturer=u-blox, Package=55-SMD, Part Description="Stand-alone Bluetooth low energy module"
U2: library part CMP-0343-00082-2, "Boost Voltage Converter with 0.7 to 5.5 V Input and 3.3 V Output, -40 to 85 degC, 6-Pin SC70 (DCK), Green (RoHS & no Sb/Br)", Manufacturer="Texas Instruments", Switching Frequency(Max)(kHz)=2000, Code_JEDEC=MO-203-AB, ComponentLink1Description=Datasheet, ComponentLink1URL=http://www.ti.com/general/docs/lit/getliterature.tsp?genericPartNumber=TPS61221&fileType=pdf, ComponentLink2Description="Package Specification", ComponentLink2URL=http://www.ti.com/litv/pdf/mpds114c, DatasheetVersion=SLVS776, Eco-Plan="Green (RoHS & no Sb/Br)", Mounting Technology="Surface Mount", PackageDescription="6-Pin Plastic Small-Outline Package, 2 x 1.3 mm Body, 0.65 mm Pitch, 2.1 mm Lead Span", PackageReference=DCK0006A, PackageVersion="revG, Jan-2007", PartNumber=TPS61221DCKR, Regulated Outputs(#)=1, SubFamily="Step-Up Regulator", Topology=Boost, Vin(Max)(V)=5.5, Vin(Min)(V)=0.7, Vout(Max)(V)=3.3, Vout(Min)(V)=3.3
U?: library part CMP-2000-06861-1, "NTAG I2C-Energy Harvesting NFC Forum Type 2 Tag with Field Detection Pin and I2C Interface, 1.7 to 3.6 V, -40 to 95 degC, 8-Pin QFN (SOT-902-3), RoHS, Tape and Reel", Manufacturer=NXP, Maximum Operating Temperature=+85C, Minimum Operating Temperature=-40C, Operating Frequency=13.56MHz, Operating Temperature Range=-40Cto+85C, Package / Case=XQFN-8, Package Description="8-Pin Quad Flat No-lead Package, Body 1.6 x 1.6 mm, Pitch 0.5 mm", Package Reference=SOT902-3, Package Version=02/2016, Brand=NXPSemiconductors, Datasheet URL=http://www.nxp.com/documents/data_sheet/NT3H1101_1201.pdf, Datasheet Version="Rev. 3.3, 07/2015", Factory Pack Quantity=4000, Function=NTAGI2CNFCForumType2interface, Manufacturer URL=http://www.nxp.com/, Memory Size=1kB, Mounting Style=SMD/SMT, Mounting Technology=SurfaceMount, Package URL=http://www.nxp.com/documents/outline_drawing/SOT902-3.pdf, Packaging=Reel, Product Category=RFIDTransponders, RoHS=True

## Nets (pads, with @x,y where several pads share a name; then routed paths per layer and width w, separated by ;. In a path a pad name is that pad's centre, name@x,y a point inside that pad or via, vN(x,y) a via of type N, cw(c..) or ccw(c..) an arc to the next point about the centre after c; other vN are vias at no path point)
+3V3: C2.2 C3.1 C8.1 P2.1 P3.2 SW2.1 U1.9 U1.10 U2.2 U2.4
AIN3_A0: P3.4 U1.25
D2: D4.2 U1.39
D3: D5.2 U1.44
D4: D3.2 U1.40
D5: SW2.2 U1.22
D+: D1.2 J1.3 U1.54
D-: D1.3 J1.2 U1.55
GND: BT1.1 BT1.2 C1.1 C2.1 C3.2 C4.1 C5.2 C6.2 C7.2 C8.2 DL2.1 J1.5 P2.3 P2.5 P3.1 PB1.B PB1.B' R4.1 R6.1 R7.1 R8.1 SW2.3 U1.6 U1.12 U1.14 U1.26 U1.30 U1.53 U1.56 U1.57 U1.58 U1.59 U1.60 U1.61 U1.62 U1.63 U1.64 U1.65 U1.66 U1.67 U1.68 U1.69 U1.70 U1.71 U2.3
NetBT1_3: BT1.3 SW1.2
NetC1_2: C1.2 L1.2 U1.31
NetC5_1: C5.1 D1.1 J1.6 J1.7 J1.8 J1.9 J1.10 J1.11 R4.2
NetD2_2: D2.2 SW1.3
NetD3_1: D3.1 R6.2
NetD4_1: D4.1 R7.2
NetD5_1: D5.1 R8.2
NetDL2_2: DL2.2 R5.1
NetL2_2: L2.2 U2.5
NetR1_1: R1.1 R2.1 U1.8
NetR1_2: R1.2 U1.2
NetR2_2: R2.2 U1.3
NetR5_2: R5.2 U1.33
RESETN: C6.1 P2.10 PB1.A PB1.A' U1.19
RX: P4.3 U1.37
SCK: U1.1
SCL: P4.2 U1.18
SDA: P4.1 U1.20
SWCLK: P2.4 U1.11
SWDIO: P2.2 U1.15
TX: P4.4 U1.38
VUSB: C4.2 C7.1 D1.4 D2.1 J1.1 L1.1 L2.1 P3.3 U2.1 U2.6
pads on no net: AN?.AC0 AN?.AC1 J1.4 P2.6 P2.7 P2.8 P2.9 P2.MH1 P2.MH2 PB1.1 SW1.1 SW1.MH1 SW1.MH2 SW1.MP1 SW1.MP2 SW1.MP3 SW1.MP4 SW2.MH1 SW2.MH2 SW2.MP1 SW2.MP2 SW2.MP3 SW2.MP4 U1.4 U1.5 U1.7 U1.13 U1.16 U1.17 U1.21 U1.23 U1.24 U1.27 U1.28 U1.29 U1.32 U1.34 U1.35 U1.36 U1.41 U1.42 U1.43 U1.45 U1.46 U1.47 U1.48 U1.49 U1.50 U1.51 U1.52 U?.1 U?.2 U?.3 U?.4 U?.5 U?.6 U?.7 U?.8

## Silkscreen, mask and mechanical layers (free items; w line width, h text height)
Mechanical 1:
  lines w0.254: 9.463,10.643 ccw(c13.273,10.643) 13.273,6.833 94.553,6.833 ccw(c94.553,10.643) 98.363,10.643 98.363,53.823 ccw(c94.553,53.823) 94.553,57.633 13.273,57.633 ccw(c13.273,53.823) 9.463,53.823 9.463,10.643

## Text inside footprints (layer, text, board x,y; h text height)
L1: Mechanical 6 "Land Pattern Adapted for Reflow Soldering" at 124.16,21.022 h0.05